# Altium PCB MABSS_currentSensor.PcbDoc
Units mm, origin at the board's own origin, x right, y up, seen from the top; angles counter-clockwise.
Board outline 35.56 x 36.07 mm, 2 copper layers (Component Side, Bottom Layer), stack 0.325 mm thick; 26 components, 25 nets, 114 pads, 20 vias.
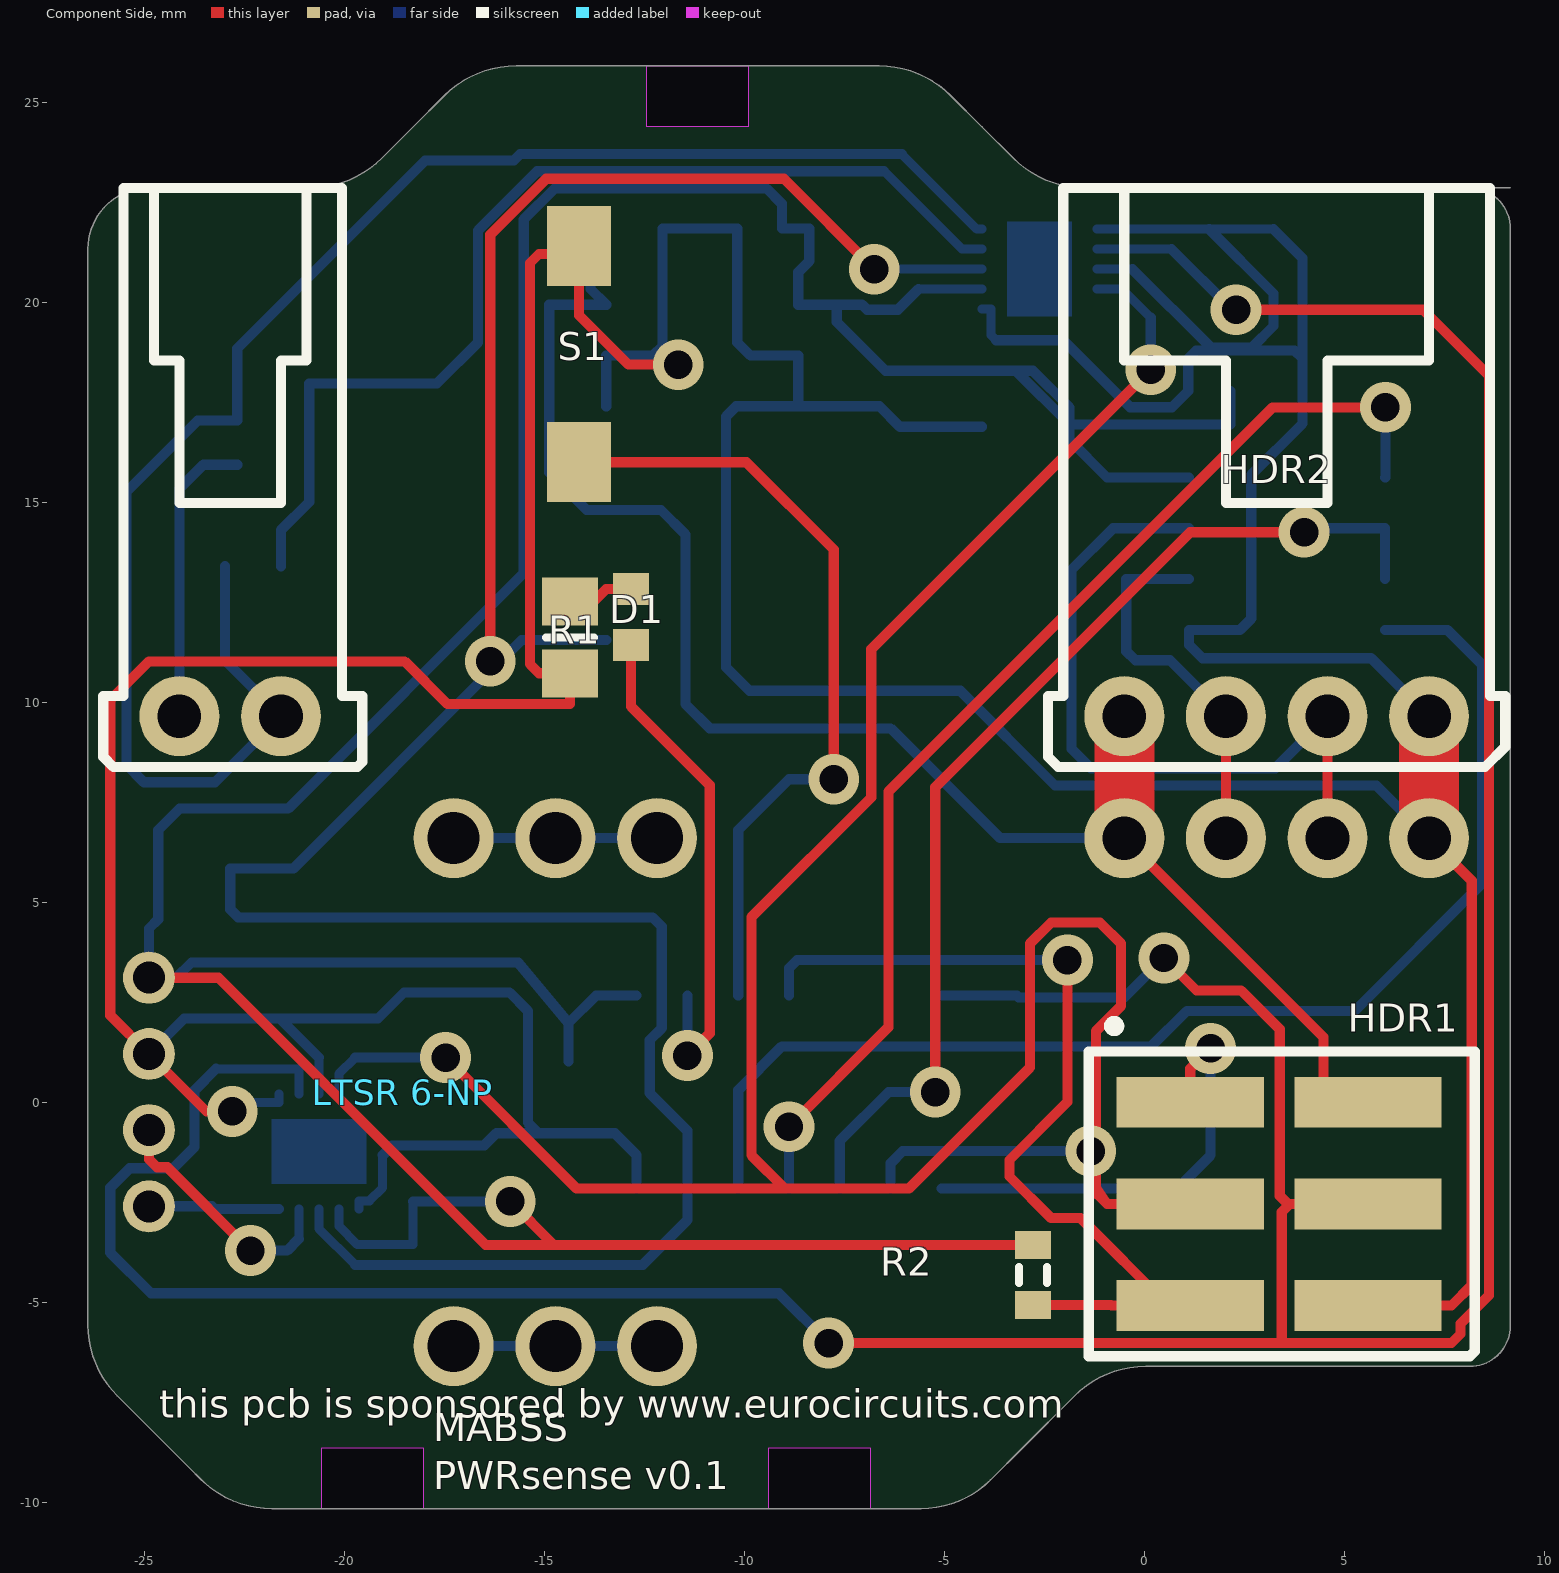
[diagram p0: Component Side view]
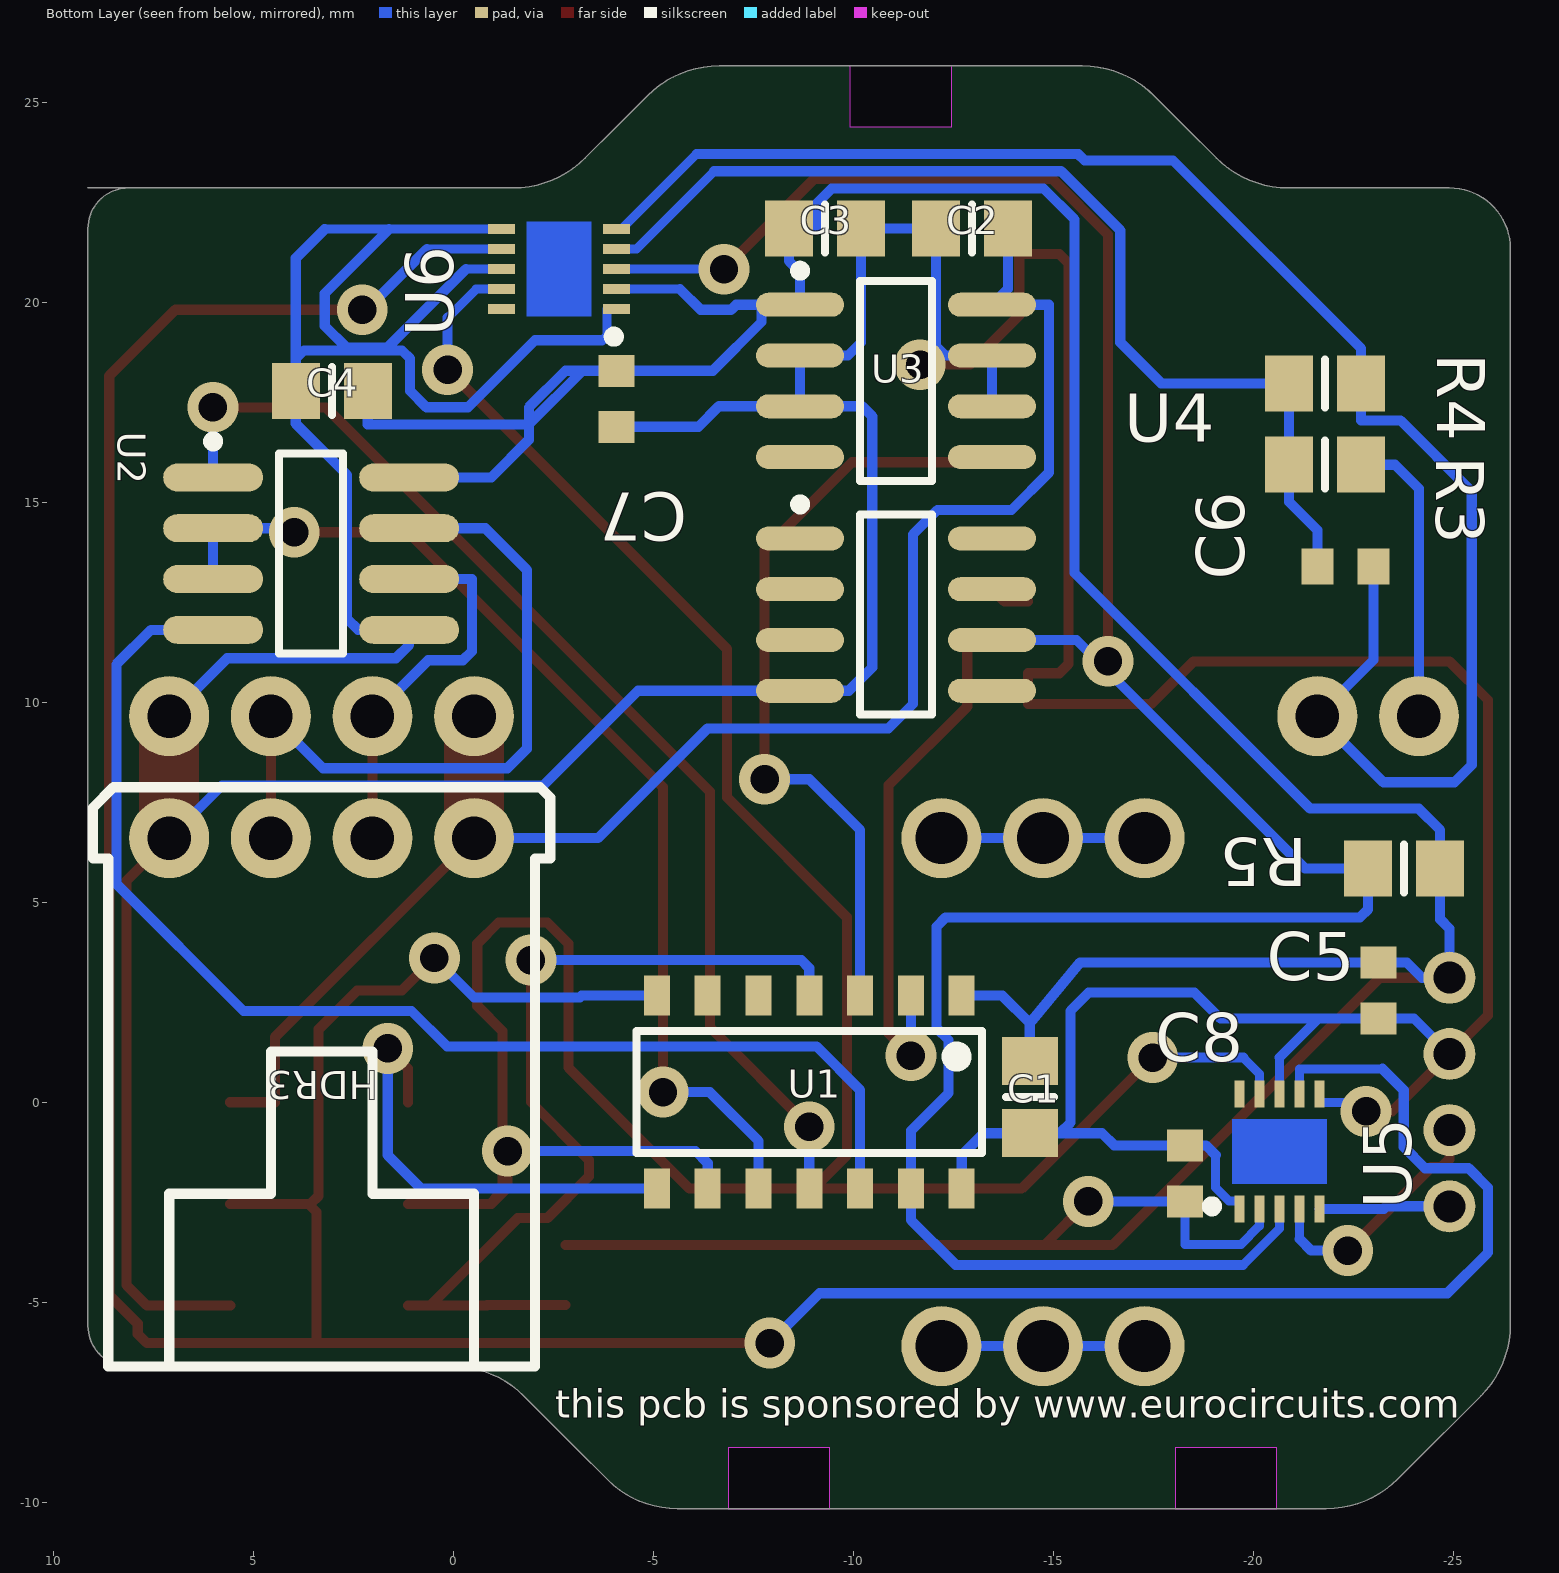
[diagram p1: Bottom Layer view, seen from below]
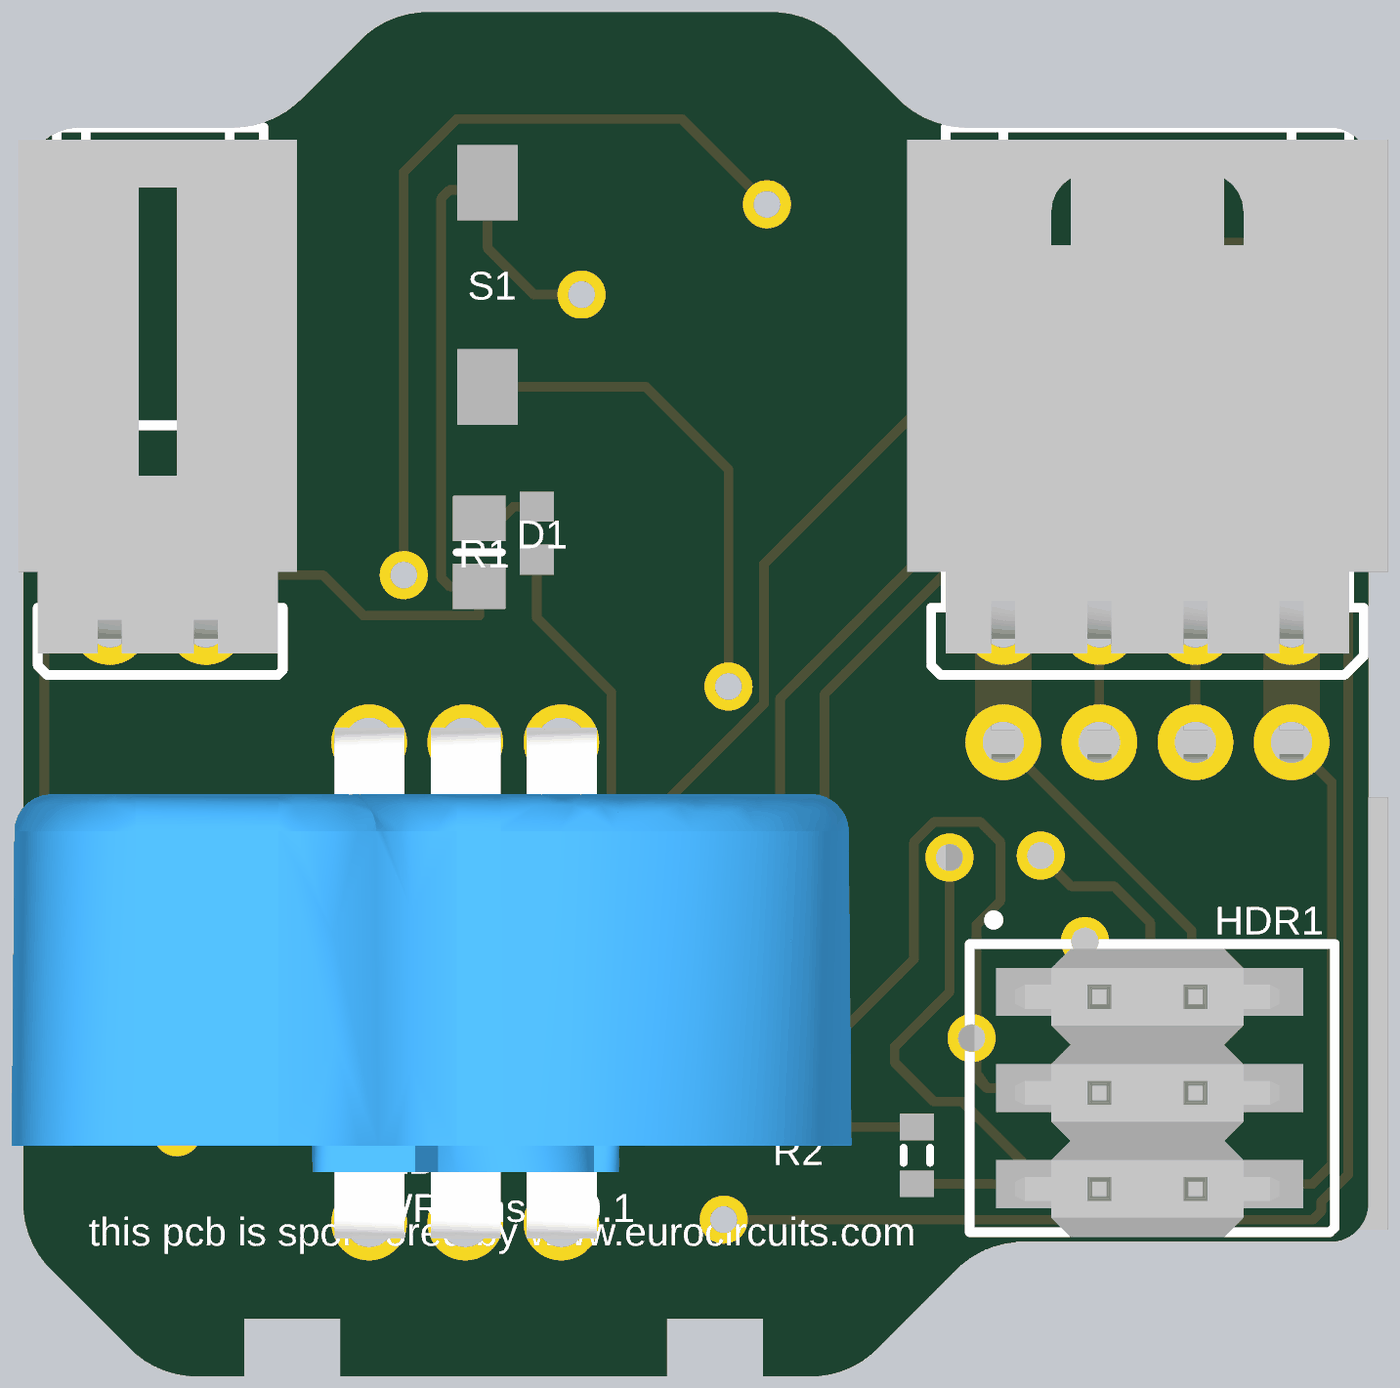
[diagram p2: 3D render of the assembled board from above, using the file's embedded part models]

## Layer stack, top to bottom
Top Solder: solder mask 0.0102, Solder Resist, Dk 3.5
Component Side: signal copper 0.0356
Dielectric 1: core 0.254, FR-4, Dk 4.2
Bottom Layer: signal copper 0.0356
Solder Side: solder mask 0.0102, Solder Resist, Dk 3.5

## Board outline
9.144,22.86 -1.488,22.86 cw(c-1.488,25.4) -3.284,23.604 -4.064,24.384 -4.844,25.164 ccw(c-6.64,23.368) -6.64,25.908 -7.112,25.908 -15.712,25.908 ccw(c-15.712,23.368) -17.508,25.164 -18.288,24.384 -19.068,23.604 cw(c-20.864,25.4) -20.864,22.86 -24.892,22.86 ccw(c-24.892,21.336) -26.416,21.336 -26.416,-3.048 -26.416,-5.562 ccw(c-23.901,-5.562) -25.679,-7.341 -23.876,-9.144 -23.597,-9.423 ccw(c-21.818,-7.645) -21.818,-10.16 -5.588,-10.16 ccw(c-5.588,-7.707) -3.854,-9.442 -3.048,-8.636 -1.753,-7.341 cw(c0.026,-9.119) 0.026,-6.604 2.54,-6.604 8.128,-6.604 ccw(c8.128,-5.588) 9.144,-5.588 9.144,21.336 9.144,21.844 ccw(c8.128,21.844) 8.128,22.86
cut-out: -12.446,24.384 -12.446,25.908 -10.922,25.908 -9.906,25.908 -9.906,24.384
cut-out: -9.398,-10.16 -9.398,-8.636 -6.858,-8.636 -6.858,-10.16
cut-out: -20.574,-10.16 -20.574,-8.636 -18.034,-8.636 -18.034,-10.16

## Design rules (kind name [scope] priority, off if disabled: settings)
Clearance [All] p1: gap=0.175
MinimumSolderMaskSliver [All] p1: minsoldermaskwidth=0.1
PolygonConnect [All] p1: connectstyle=Relief reliefconductorwidth=0.254 reliefentries=4 polygonreliefangle="90 Angle" airgapwidth=0.254
RoutingVias [All] p1: holewidth=0.711 width=1.27 viastyle="Through Hole" minholewidth=0.711 minwidth=1.27 maxholewidth=0.711 maxwidth=1.27
SMDNeckDown [All] p1: percent=90.000
SolderMaskExpansion [All] p1: expansion=0
Width [All] p1: maxlimit=2 minlimit=0.18 preferedwidth=0.254
29 further rules are at their usual default settings.

## Classes and differential pairs
component class U_sensor_specific: C5 C6 C7 C8 HDR1 HDR2 HDR3 R3 R4 R5 U5 U6
component class U_general_Interface: C1 C2 C3 C4 D1 R1 R2 S1 U1 U5 U6

## Components (designator, comment, footprint, x,y, rotation, side; value= is the part's Value field where it differs from the comment)
C1 "Cap2" 6-0805_N -14.402,0.127 r270 bottom
C2 "Cap2" 6-0805_N -12.954,21.844 r0 bottom
C3 "Cap2" 6-0805_N -9.282,21.844 r180 bottom
C4 "Cap2" 6-0805_N 3.048,17.78 r0 bottom
C5 "Cap Semi" 1608[0603] -23.114,2.794 r90 bottom
C6 "Cap Semi" 1608[0603] -22.293,13.4 r0 bottom
C7 "Cap Semi" 1608[0603] -4.064,17.588 r270 bottom
C8 "Cap Semi" 1608[0603] -18.288,-1.778 r90 bottom
D1 "LED0" 1608[0603] -12.837,12.133 r90 top
HDR1 "Programming header" MOLEX_HEADER_6_SMD 1.143,0 r270 top
HDR2 "RS-485 interface" MOLEX_HEADER_4H_SHRD -0.508,9.652 r0 top
HDR3 "RS-485 interface" MOLEX_HEADER_4H_SHRD -0.508,6.604 r0 bottom
HDRvSense "MOLEX_HEADER_2H_SHRD" MOLEX_HEADER_2H_SHRD -22.86,9.779 r0 top
"LTSR 6-NP" "LTSR 6-NP" "LTSR 6-NP" -14.732,6.604 r180 top
R1 "Res1" 6-0805_N -14.361,11.625 r270 top
R2 "Res1" J1-0603 -2.794,-4.318 r90 top
R3 "Res1" 6-0805_N -21.785,15.94 r180 bottom
R4 "Res1" 6-0805_N -21.785,17.972 r180 bottom
R5 "Res1" 6-0805_N -23.76,5.842 r180 bottom
S1 "SW-PB" ADTSM3 -13.24,14.902 r90 top
U1 "ATtiny441" 6ST1_L -8.89,0.254 r270 bottom
U2 "SP485" 8S1_M 3.564,13.716 r180 bottom
U3 "L78L05ACD" 8S1_N -11.06,18.034 r180 bottom
U4 "LT1634" 8S1_N -11.06,12.192 r180 bottom
U5 "LTC2482" DFN33 -20.644,-2.664 r180 bottom
U6 "LTC2482" DFN33 -4.064,20.828 r90 bottom

## Footprints (in the part's own frame and the unit in brackets; to place one, negate y for a bottom-side part, rotate by r counter-clockwise, add the part's x,y. Pads: shape width x height; smd on the part's side, far side on the other; paste and mask are expansions set on the pad)
6-0805_N [mm] "Chip Resistor, Body 2.0x1.2mm, IPC Medium Density"
  rect 1.2x1.4 smd: 1(-0.9,0) 2(0.9,0)
  silkscreen extent 0,-0.6 0,0.6, body extent -1.07,-0.7 1.07,0.7, height 0.7
6ST1_L [mm] "SOT23, 6-Leads, Body 2.9x1.6mm, Pitch 0.95mm, Lead Span 2.7mm, IPC High Density"
  rect 1x0.65 smd: 1(-2.413,3.81) 2(-2.413,2.54) 3(-2.413,1.27) 4(-2.413,0) 5(-2.413,-1.27) 6(-2.413,-2.54) 7(-2.413,-3.81) 8(2.413,-3.81) 9(2.413,-2.54) 10(2.413,-1.27) 11(2.413,0) 12(2.413,1.27) 13(2.413,2.54) 14(2.413,3.81)
  silkscreen extent -1.52,-4.32 1.52,4.32, body extent -1.91,-4.32 1.91,4.32, height 1.45
8S1_M [mm] "SOIC, 8-Leads, Body 4.9x3.9mm, Pitch 1.27mm, IPC Low Density"
  oval 2.5x0.7 smd: 1(-2.45,1.905) 2(-2.45,0.635) 3(-2.45,-0.635) 4(-2.45,-1.905) 5(2.45,-1.905) 6(2.45,-0.635) 7(2.45,0.635) 8(2.45,1.905)
  silkscreen extent -2.58,-2.5 0.8,2.93, body extent -2,-2.5 2,2.5, height 1.75
8S1_N [mm] "SOIC, 8-Leads, Body 4.9x3.9mm, Pitch 1.27mm, IPC Medium Density"
  oval 2.2x0.6 smd: 1(-2.4,1.905) 2(-2.4,0.635) 3(-2.4,-0.635) 4(-2.4,-1.905) 5(2.4,-1.905) 6(2.4,-0.635) 7(2.4,0.635) 8(2.4,1.905)
  silkscreen extent -2.53,-2.5 0.9,2.88, body extent -2,-2.5 2,2.5, height 1.75
1608[0603] [mm] "Chip Capacitor, Body 1.6x0.8mm, IPC High Density"
  rect 0.8x0.9 smd: 1(-0.7,0) 2(0.7,0)
  body extent -0.87,-0.48 0.87,0.48, height 1.3
ADTSM3 [mm]
  rect 2x1.6 smd: 1(1.1,0.9) 2(6.5,0.9)
  body extent 1,-1.3 6.6,3.1, height 4
DFN33 [mm] "DD Package  10-Lead Plastic DFN (3mm × 3mm)"
  rect 0.25x0.675 smd paste+0 mask+0: 1(-1,0) 10(-1,2.875)
  rect 0.25x0.675 smd mask+0: 2(-0.5,0) 3(0,0) 4(0.5,0) 5(1,0) 6(1,2.875) 7(0.5,2.875) 8(0,2.875) 9(-0.5,2.875)
  Component Side region: -1.188,2.25 1.187,2.25 1.187,0.625 -1.188,0.625
  silkscreen extent -1.81,-0.06 -1.56,0.19, body extent -1.52,-0.13 1.52,2.92, height 0.75
J1-0603 [mm] "Chip Resistor, Body 1.6x0.8mm, IPC High Density"
  rect 0.7x0.9 smd: 1(-0.75,0) 2(0.75,0)
  silkscreen extent -0.2,-0.35 0.2,0.35, body extent -0.85,-0.48 0.85,0.48, height 0.9
"LTSR 6-NP" [mm]
  round 2 hole 1.3 unplated: 1(2.54,0) 2(0,0) 3(-2.54,0) 4(-2.54,12.7) 5(0,12.7) 6(2.54,12.7)
  round 1.3 hole 0.8 unplated: +5V(10.16,3.49) GND(10.16,5.395) OUT(10.16,7.3) ref(10.16,9.205)
  body extent -10.21,-0.38 11.99,13.12, height 2.8
MOLEX_HEADER_2H_SHRD [mm]
  round 2 hole 1.09 unplated: 1(-1.27,-0.127) 2(1.27,-0.127)
  silkscreen extent -3.18,-1.4 3.3,13.08, body extent -3.68,-0.83 3.68,12.76, height 7.06
MOLEX_HEADER_4H_SHRD [mm]
  round 2 hole 1.09: 1(0,0) 2(2.54,0) 3(5.08,0) 4(7.62,0)
  silkscreen extent -1.91,-1.27 9.53,13.21, body extent -2.54,-0.7 10.16,12.89, height 7.06
MOLEX_HEADER_6_SMD [mm] "Part Number: 15-91-0060"
  rect 1.27x3.68 smd: 1(0,0) 2(0,4.445) 3(2.54,0) 4(2.54,4.445) 5(5.08,0) 6(5.08,4.445)
  silkscreen extent -2.03,-2.54 6.35,7.11, body extent -1.14,-1.33 6.48,5.65, height 9.64

## Part data
C1 C2 C3 C4: "Capacitor"
C5 C6 C7 C8: "Capacitor (Semiconductor SIM Model)"
D1: "Typical INFRARED GaAs LED"
HDR1: library part PRGM_HDR
HDR2 HDR3: library part MABSS_RS485, "Part Number: 70553-0003. MABSS connector"
HDRvSense: "Part Number: 70553-0001. 2-wire signal inputs"
R1 R2 R3 R4 R5: "Resistor"
S1: "Switch"
U3: "Positive Voltage Regulator"

## Via types
v1: diameter 1.27, hole 0.711, Component Side to Bottom Layer, 20 vias

## Nets (pads, with @x,y where several pads share a name; then routed paths per layer and width w, separated by ;. In a path a pad name is that pad's centre, name@x,y a point inside that pad or via, vN(x,y) a via of type N, cw(c..) or ccw(c..) an arc to the next point about the centre after c; other vN are vias at no path point)
+5V: "LTSR 6-NP.+5V" C1.1 C3.1 C4.1 C5.2 C7.1 C8.1 R2.2 R5.2 U1.1 U2.8 U3.1 U5.2 U6.2 | length 104.3
  Component Side w0.254: -24.892,3.114 -23.155,3.114 -16.473,-3.568 -14.771,-3.568 ; v1(-15.861,-2.478) -14.771,-3.568 ; R2.2 -14.771,-3.568
  Bottom Layer w0.225: U5.2 -20.144,-3.09 -19.678,-3.556 -18.288,-3.556 C8.1 ; -5.657,20.328 U6.2
  Bottom Layer w0.254: C8.1 v1(-15.861,-2.478) ; C1.1 -14.402,1.981 ; U1.1 -13.716,2.667 -14.402,1.981 ; -5.657,20.328 -6.173,19.812 -6.934,19.812 -7.061,19.939 U3.1@-7.696,19.939 ; U2.8 -0.94,15.621 -1.88,16.561 -1.88,16.947 ; C4.1 2.148,16.947 -1.88,16.947 ; -14.402,1.981 -15.661,3.494 C5.2 -23.826,3.494 -24.206,3.114 -24.892,3.114 -24.892,4.343 -24.66,4.575 R5.2 -24.66,6.807 -24.127,7.341 -21.412,7.341 -15.519,13.233 -15.519,22.073 -14.746,22.846 -9.449,22.846 -9.068,22.465 -9.068,21.844 C3.1 -8.382,21.03 -8.66,20.752 U3.1 U3.1@-7.696,19.939 ; U3.1@-7.696,19.939 -7.696,19.507 -6.477,18.288 C7.1 -3.22,18.288 ; -3.22,18.288 -2.794,18.288 -1.88,17.374 -1.88,16.947 ; -3.22,18.288 -1.88,16.947
GND: "LTSR 6-NP.GND" C1.2 C2.2 C3.2 C4.2 C5.1 C7.2 C8.2 HDR1.6 HDR2.4 HDR3.4 R1.2 S1.2 U1.14 U2.5 U3.2 U3.3 U3.6 U3.7 U4.4 U5.1 U5.6 U5.8 U6.1 U6.6 U6.8 | length 175.6
  Component Side w0.254: v1(-22.809,-0.229) -23.454,-0.229 -24.892,1.209 -25.857,2.174 -25.857,10.058 -24.892,11.024 -18.498,11.024 -17.429,9.955 -14.361,9.955 R1.2 -15.138,10.725 -15.367,10.954 -15.367,20.98 -15.138,21.209 S1.2@-14.14,21.209 ; S1.2 S1.2@-14.14,21.209 ; v1(-11.659,18.44) -12.903,18.44 -14.14,19.677 S1.2@-14.14,21.209 ; HDR1.6 7.671,-5.08 8.179,-4.572 8.179,5.537 HDR3.4
  Component Side w1.5: HDR3.4 HDR2.4
  Bottom Layer w0.225: v1@-22.581,0 -21.644,0 U5.6 ; U5.8 -20.644,1.118 ; U5.1 -19.644,-2.464 -19.38,-2.464 -19.05,-2.134 -19.05,-1.321 ; U6.1 -3.835,19.828 -3.835,19.177 -3.708,19.05 ; U6.8 -0.305,20.828 ; U6.6 1.616,21.828 3.223,21.828
  Bottom Layer w0.254: -24.892,1.209 -24.007,2.094 C5.1 -21.62,2.094 ; v1(-22.809,-0.229) v1@-22.581,0 ; -20.644,1.118 -21.62,2.094 ; -19.05,-1.321 -18.807,-1.078 C8.2 -16.51,-1.078 -16.205,-0.773 -15.153,-0.773 ; U3.6 U3.7 -12.294,18.669 ; U1.14 -12.7,-1.321 -13.248,-0.773 C1.2 -15.153,-0.773 ; v1(-11.659,18.44) -11.887,18.669 -12.294,18.669 ; C7.2 -6.118,16.888 -6.629,17.399 U3.3 ; -3.708,19.05 -2.032,19.05 -0.358,17.376 0.683,17.376 1.089,17.783 1.089,18.593 1.293,18.796 3.745,18.796 3.948,18.593 ; -0.305,20.828 1.651,18.872 2.69,18.872 3.223,19.406 3.223,20.221 1.616,21.828 ; 3.223,21.828 3.948,21.103 3.948,18.593 ; HDR3.4 5.795,7.921 -2.239,7.921 -4.605,10.287 U4.4 -9.877,10.287 -10.462,10.871 -10.462,17.148 -10.211,17.399 U3.3 ; HDR2.4 5.664,11.1 1.448,11.1 1.114,11.434 U2.5 2.388,11.811 2.667,12.09 2.667,15.686 3.948,16.967 C4.2 3.948,18.593 ; -21.62,2.094 -19.166,2.094 -18.517,2.743 -15.875,2.743 -15.418,2.286 -15.418,-0.508 -15.153,-0.773 ; -12.294,18.669 -12.054,18.909 C2.2 C3.2 -10.182,18.996 -9.855,18.669 U3.2 U3.3
NetC6_1: C6.1 HDRvSense.2 R4.2 U6.5 | length 42.6
  Bottom Layer w0.225: -6.067,23.704 -4.191,21.828 U6.5
  Bottom Layer w0.254: C6.1 -22.993,11.055 HDRvSense.2 -23.241,8.001 -25.019,8.001 -25.451,8.433 -25.451,15.265 -23.673,17.043 -22.685,17.043 R4.2 -22.685,18.844 -17.983,23.546 -15.772,23.546 -15.614,23.704 -6.067,23.704
NetC6_2: C6.2 R3.1 R4.1 U6.4 | length 26.3
  Bottom Layer w0.225: -6.511,23.275 -4.564,21.328 U6.4
  Bottom Layer w0.254: C6.2 -21.593,14.3 -20.885,15.008 R3.1 R4.1 -17.69,17.972 -16.662,18.999 -16.662,21.798 -15.185,23.275 -6.511,23.275
NetD1_1: D1.1 U1.2 | length 12.8
  Component Side w0.254: D1.1 -12.837,9.891 -10.871,7.925 -10.871,1.727 v1(-11.43,1.168)
  Bottom Layer w0.254: v1(-11.43,1.168) U1.2
NetD1_2: D1.2 R1.1 | length 1.7
  Component Side w0.254: R1.1 -13.767,12.525 -13.459,12.833 D1.2
NetHDR1_1: HDR1.1 U1.8 | length 11.3
  Component Side w0.254: HDR1.1 1.143,0.838 v1(1.651,1.346)
  Bottom Layer w0.254: U1.8 0.813,-2.159 1.651,-1.321 v1(1.651,1.346)
NetHDR1_3: HDR1.3 U1.9 U5.9 U6.9 | length 70.5
  Component Side w0.254: v1(-17.475,1.118) -14.199,-2.159 -8.992,-2.159 ; v1(-1.346,-1.219) -1.346,-2.134 -0.94,-2.54 ; v1(0.152,18.313) -6.835,11.326 -6.835,7.62 -9.83,4.626 -9.83,-1.321 -8.992,-2.159 ; HDR1.3 -0.94,-2.54 ; -8.992,-2.159 -5.893,-2.159 -2.867,0.866 -2.867,3.965 -2.337,4.496 -1.118,4.496 -0.587,3.965 -0.587,2.41 -1.219,1.778 -1.219,-2.134 -0.94,-2.54
  Bottom Layer w0.225: U5.9 -20.144,0.711 -19.738,1.118 ; U6.9 -0.559,20.328 0.152,19.617
  Bottom Layer w0.254: -19.738,1.118 v1(-17.475,1.118) ; U1.9 -6.35,-1.524 -6.045,-1.219 v1(-1.346,-1.219) ; v1(0.152,18.313) 0.152,19.617
NetHDR1_4: HDR1.4 U1.7 U5.7 U6.7 | length 98.8
  Component Side w0.254: v1(-7.899,-6.02) 3.429,-6.02 ; v1(0.483,3.607) 1.295,2.794 2.413,2.794 3.378,1.829 3.378,-2.337 3.581,-2.54 3.632,-2.54 ; v1(2.286,19.812) 6.96,19.812 8.611,18.161 8.611,-4.826 7.899,-5.537 7.899,-5.791 7.671,-6.02 3.429,-6.02 ; HDR1.4 3.632,-2.54 ; 3.429,-6.02 3.429,-2.743 3.632,-2.54
  Bottom Layer w0.225: -23.216,0.838 -21.144,0.838 U5.7 ; U6.7 0.671,21.328
  Bottom Layer w0.254: -23.216,0.838 -23.749,0.305 -23.749,-1.116 -24.282,-1.649 -25.373,-1.649 -25.857,-2.134 -25.857,-3.759 -24.841,-4.775 -9.144,-4.775 v1(-7.899,-6.02) ; U1.7 -3.198,2.667 -3.15,2.619 -0.505,2.619 v1(0.483,3.607) ; 0.671,21.328 2.187,19.812 v1(2.286,19.812)
NetHDR1_5: HDR1.5 R2.1 U1.4 | length 23
  Component Side w0.254: R2.1 -0.838,-5.068 -0.826,-5.08 HDR1.5@0.584,-5.08 ; v1(-1.93,3.556) -1.93,0.006 -3.378,-1.442 -3.378,-1.854 -2.337,-2.896 -1.6,-2.896 HDR1.5@0.584,-5.08 ; HDR1.5 HDR1.5@0.584,-5.08
  Bottom Layer w0.254: U1.4 -8.89,3.353 -8.687,3.556 v1(-1.93,3.556)
NetHDR2_2: HDR2.2 HDR3.2 U2.6 | length 9.6
  Component Side w0.254: HDR3.2 HDR2.2
  Bottom Layer w0.254: U2.6 -0.457,13.081 -0.457,11.278 -0.229,11.049 0.635,11.049 HDR2.2
NetHDR2_3: HDR2.3 HDR3.3 U2.7 | length 18
  Component Side w0.254: HDR3.3 HDR2.3
  Bottom Layer w0.254: U2.7 -0.787,14.351 -1.829,13.31 -1.829,8.839 -1.34,8.35 3.27,8.35 HDR2.3
NetHDRvSense_1: HDRvSense.1 R3.2 | length 7.4
  Bottom Layer w0.254: HDRvSense.1 -24.13,15.342 -23.532,15.94 R3.2
"NetLTSR 6-NP_1": "LTSR 6-NP.1" "LTSR 6-NP.2" "LTSR 6-NP.3" | length 5.1
  Bottom Layer w0.254: -17.272,6.604 -14.732,6.604 -12.192,6.604
"NetLTSR 6-NP_4": "LTSR 6-NP.4" "LTSR 6-NP.5" "LTSR 6-NP.6" | length 5.1
  Bottom Layer w0.254: -17.272,-6.096 -14.732,-6.096 -12.192,-6.096
"NetLTSR 6-NP_OUT": "LTSR 6-NP.OUT" U5.4 | length 6.3
  Component Side w0.254: -24.892,-0.696 -24.892,-1.422 -24.689,-1.626 -24.435,-1.626 v1(-22.352,-3.708)
  Bottom Layer w0.225: -21.144,-3.415 U5.4
  Bottom Layer w0.254: v1(-22.352,-3.708) -21.438,-3.708 -21.144,-3.415
"NetLTSR 6-NP_ref": "LTSR 6-NP.ref" U5.5 | length 3.3
  Bottom Layer w0.254: -24.892,-2.601 -23.317,-2.601 -23.254,-2.664 U5.5
NetR5_1: R5.1 U1.13 U4.6 U5.3 U6.3 | length 66.8
  Component Side w0.254: v1(-16.358,11.024) -16.358,21.692 -14.961,23.089 -9.017,23.089 v1(-6.756,20.828)
  Bottom Layer w0.225: U5.3 -20.644,-3.156 -19.736,-4.064 ; v1(-6.756,20.828) U6.3
  Bottom Layer w0.254: -19.736,-4.064 -12.548,-4.064 -11.43,-2.946 U1.13 -11.43,-0.711 -12.37,0.229 -12.37,1.557 -12.073,1.854 -12.073,4.394 -12.302,4.623 -22.657,4.623 -22.86,4.826 R5.1 -21.285,5.842 v1@-16.231,10.897 ; v1(-16.358,11.024) v1@-16.231,10.897 ; U4.6 -15.57,11.557 v1@-16.231,10.897
NetS1_1: S1.1 U1.3 | length 20.1
  Component Side w0.254: S1.1 -9.957,16.002 -7.772,13.818 v1(-7.772,8.077)
  Bottom Layer w0.254: U1.3 -10.16,6.807 -8.89,8.077 v1(-7.772,8.077)
NetU1_5: U1.5
NetU1_6: U1.6
NetU1_10: U1.10 U2.2 U2.3 | length 26.9
  Component Side w0.254: v1(-5.232,0.254) -5.232,7.874 1.143,14.249 v1(3.988,14.249)
  Bottom Layer w0.254: U1.10 -7.62,-0.965 -6.401,0.254 v1(-5.232,0.254) ; v1(3.988,14.249) 4.089,14.351 U2.2 U2.3
NetU1_11: U1.11 U2.1 | length 29.1
  Component Side w0.254: v1(-8.89,-0.61) -6.406,1.874 -6.406,7.767 3.2,17.374 v1(6.02,17.374)
  Bottom Layer w0.254: U1.11 v1(-8.89,-0.61) ; U2.1 6.02,15.621 v1(6.02,17.374)
NetU1_12: U1.12 U2.4 | length 31.5
  Bottom Layer w0.254: U1.12 -10.16,0.305 -9.068,1.397 0.17,1.397 1.056,2.283 5.255,2.283 8.433,5.461 8.433,10.947 7.569,11.811 U2.4
VCC: C2.1 HDR1.2 HDR2.1 HDR3.1 U3.8 | length 41.2
  Component Side w0.254: HDR3.1 4.47,1.626 4.47,0 HDR1.2
  Component Side w1.5: HDR3.1 HDR2.1
  Bottom Layer w0.254: C2.1 -13.854,20.333 U3.8 -14.884,19.939 -14.884,15.748 -13.945,14.808 -12.09,14.808 -11.481,14.199 -11.481,9.957 -10.871,9.347 -6.35,9.347 -3.607,6.604 HDR3.1
pads on no net: U3.4 U3.5 U4.1 U4.2 U4.3 U4.5 U4.7 U4.8 U5.10 U6.10

## Silkscreen, mask and mechanical layers (free items; w line width, h text height)
Top Overlay:
  text "this pcb is sponsored by www.eurocircuits.com" at -24.638,-8.128 h1.2
  text "MABSS / PWRsense v0.1" at -17.78,-9.906 h1.2
Bottom Overlay:
  text "this pcb is sponsored by www.eurocircuits.com" at -2.54,-8.128 h1.2